# EAGLE board Elektronikentwurf_Part_01_v9 (EAGLE 9.7.0)
LOETE-SEITE: LOETE-SEITE; STECK-SEITE: STECK-SEITE
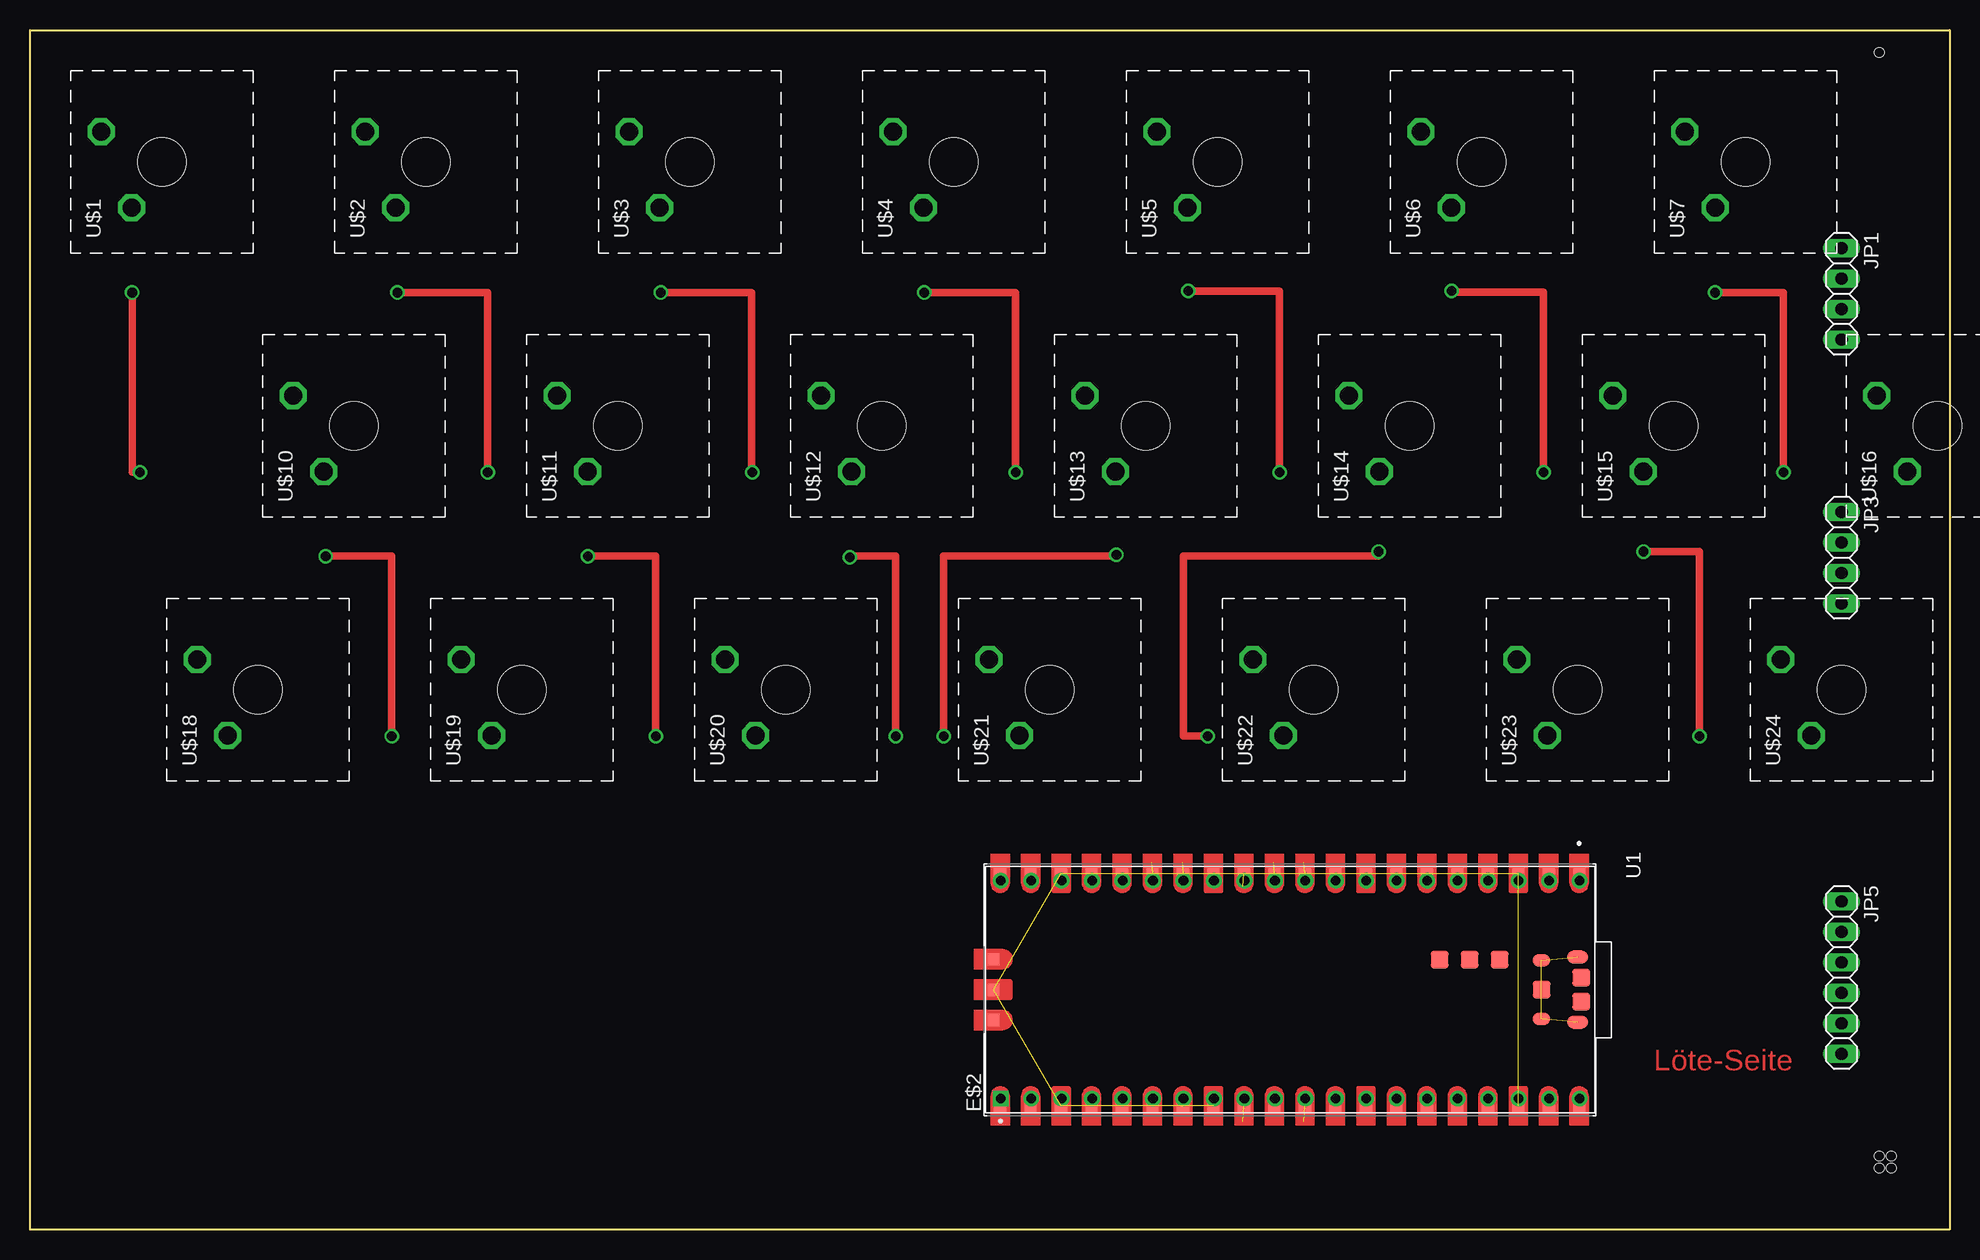
[diagram p0: board, top side]
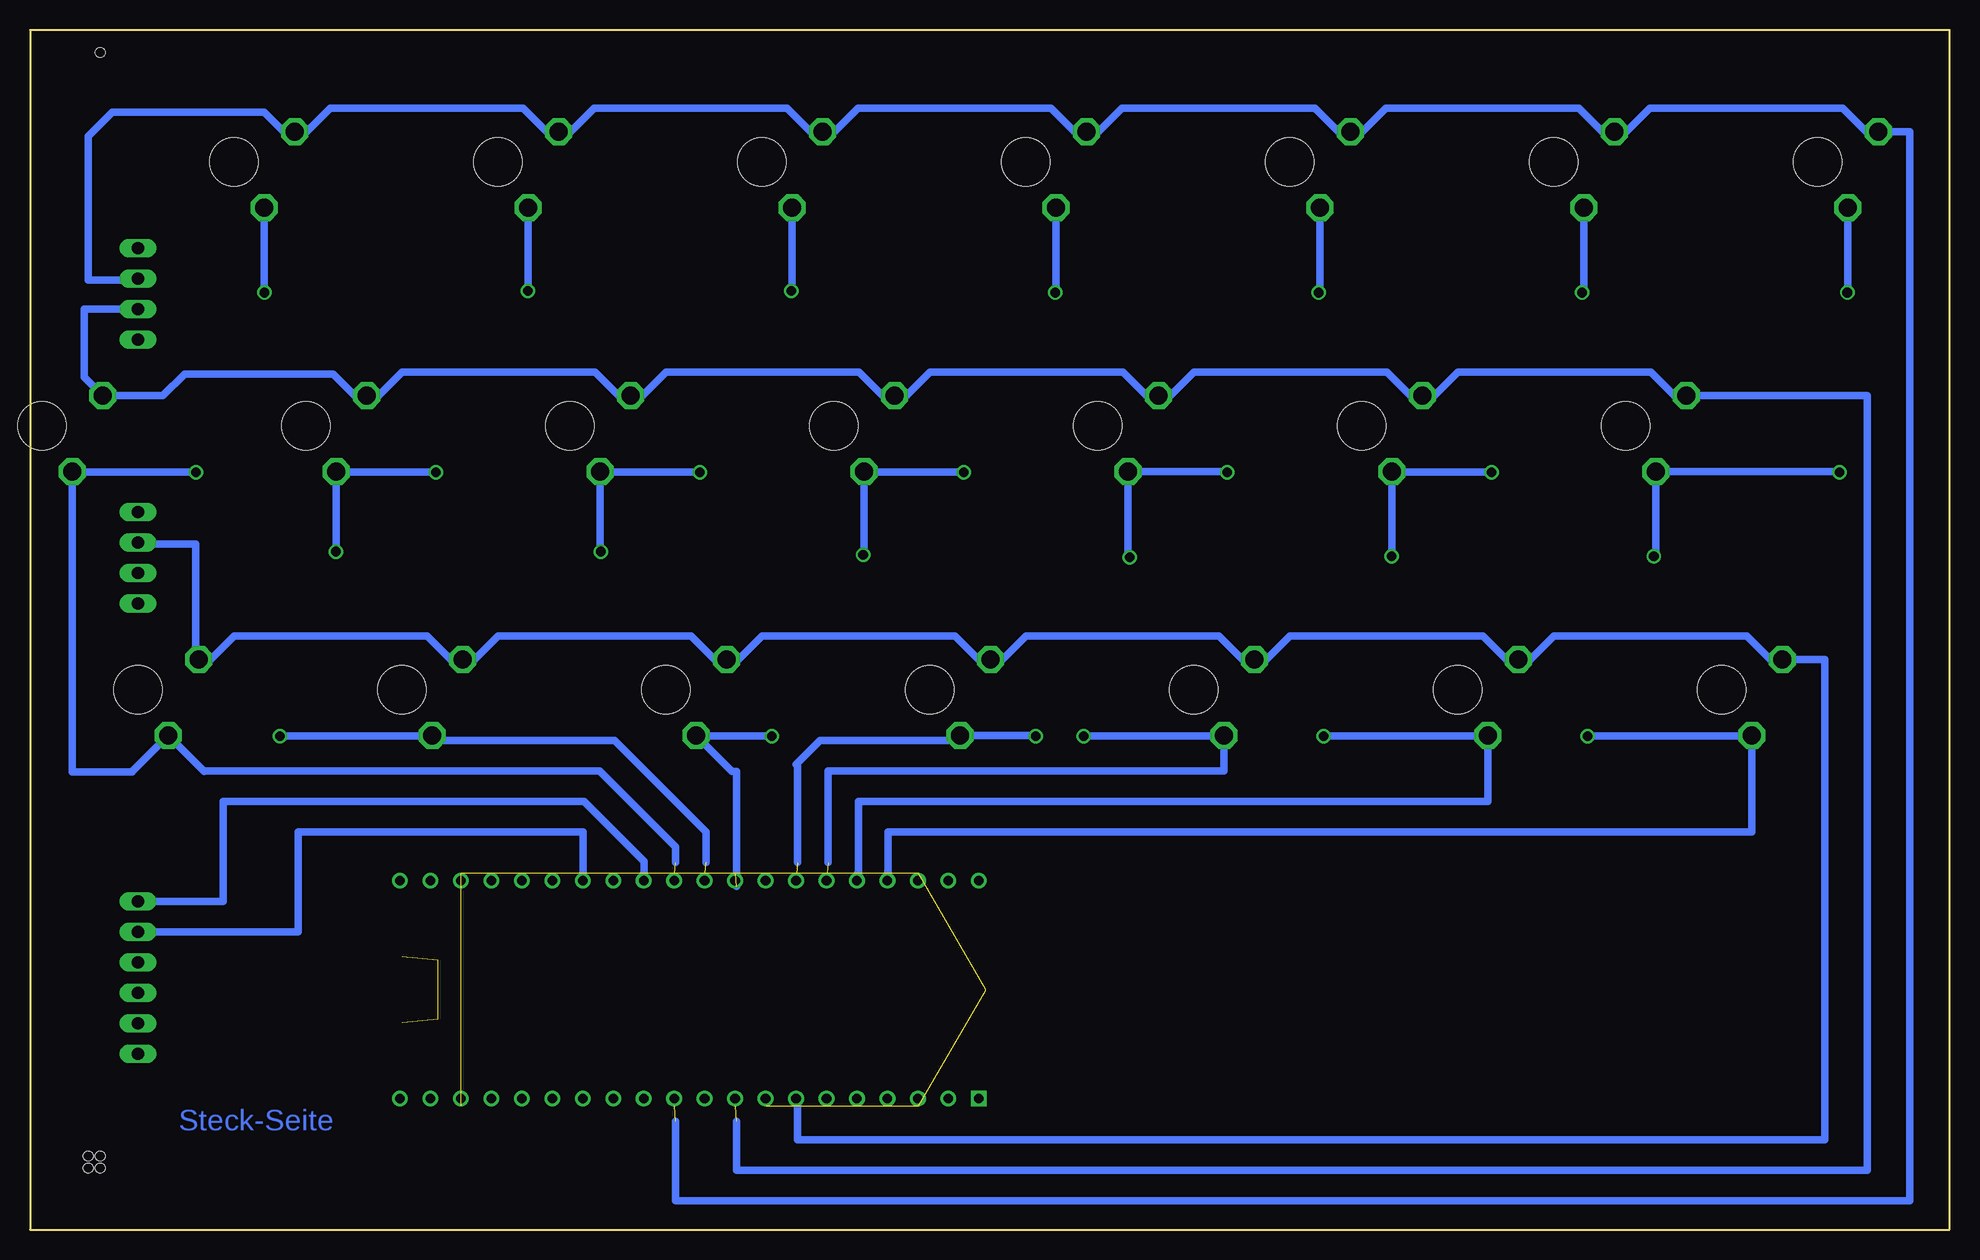
[diagram p1: board, bottom side, seen from below]

Size 160 x 100 mm. Coordinates in mm from the lower left corner, seen from the top.
Outline: 0,0 0,100 160,100 160,0 0,0
Copper layers (1*16): Top 0.035mm / dielectric 1.5mm / Bottom 0.035mm
Design rules "Fusion Electronics Design Rules": minimum track width 6mil, minimum drill 0.35mm, track to track 6mil, track to pad 6mil, pad to pad 6mil, via to via 6mil, smd to smd 6mil, copper to edge 40mil, drill to drill 6mil, minimum pad ring 10mil, minimum via ring 8mil, stop-mask expansion 4mil, vias tented up to drill 9999mil, thermal gap 10mil
Holes 0.8 mm at 154.15,6.13 155.15,6.13 155.15,5.13 154.15,5.13 154.15,98.13

## Footprints (pad centres in the part's own frame; a part is rotated, then mirrored left to right if it is on the bottom)
HARWIN_D2840-42 = drill 0.8 square: 1 -7.62,24.13 | drill 0.8: 2 -7.62,21.59; 3 -7.62,19.05; 4 -7.62,16.51; 5 -7.62,13.97; 6 -7.62,11.43; 7 -7.62,8.89; 8 -7.62,6.35; 9 -7.62,3.81; 10 -7.62,1.27; 11 -7.62,-1.27; 12 -7.62,-3.81; 13 -7.62,-6.35; 14 -7.62,-8.89; 15 -7.62,-11.43; 16 -7.62,-13.97; 17 -7.62,-16.51; 18 -7.62,-19.05; 19 -7.62,-21.59; 20 -7.62,-24.13; 21 10.541,-24.13; 22 10.541,-21.59; 23 10.541,-19.05; 24 10.541,-16.51; 25 10.541,-13.97; 26 10.541,-11.43; 27 10.541,-8.89; 28 10.541,-6.35; 29 10.541,-3.81; 30 10.541,-1.27; 31 10.541,1.27; 32 10.541,3.81; 33 10.541,6.35; 34 10.541,8.89; 35 10.541,11.43; 36 10.541,13.97; 37 10.541,16.51; 38 10.541,19.05; 39 10.541,21.59; 40 10.541,24.13
1X04 = drill 1.016 long: 1 -3.81,0; 2 -1.27,0; 3 1.27,0; 4 3.81,0
1X06 = drill 1.016 long: 1 -6.35,0; 2 -3.81,0; 3 -1.27,0; 4 1.27,0; 5 3.81,0; 6 6.35,0
MODULE_SC0917 = smd 1 x 1: 1 -9.69,24.13; 2 -9.69,21.59; 3 -9.69,19.05; 4 -9.69,16.51; 5 -9.69,13.97; 6 -9.69,11.43; 7 -9.69,8.89; 8 -9.69,6.35; 9 -9.69,3.81; 10 -9.69,1.27; 11 -9.69,-1.27; 12 -9.69,-3.81; 13 -9.69,-6.35; 14 -9.69,-8.89; 15 -9.69,-11.43; 16 -9.69,-13.97; 17 -9.69,-16.51; 18 -9.69,-19.05; 19 -9.69,-21.59; 20 -9.69,-24.13; 21 9.69,-24.13; 22 9.69,-21.59; 23 9.69,-19.05; 24 9.69,-16.51; 25 9.69,-13.97; 26 9.69,-11.43; 27 9.69,-8.89; 28 9.69,-6.35; 29 9.69,-3.81; 30 9.69,-1.27; 31 9.69,1.27; 32 9.69,3.81; 33 9.69,6.35; 34 9.69,8.89; 35 9.69,11.43; 36 9.69,13.97; 37 9.69,16.51; 38 9.69,19.05; 39 9.69,21.59; 40 9.69,24.13; D1 -2.54,-24.7; D2 0,-24.7; D3 2.54,-24.7 | smd 1.1 x 1.8: A -2.725,24; B 2.725,24 | smd 1.05 x 1.45: C -2.425,20.97; D 2.425,20.97 | smd 1.5 x 1.5: TP1 0,21; TP2 1,24.3; TP3 -1,24.3; TP4 -2.5,17.5; TP5 -2.5,15; TP6 -2.5,12.5
CHERRY_MX1A-11NN_SWITCH = drill 1.5 octagon: P$1 2.51,5.08; P$2 -3.81,2.54 | hole 3.988: 0,0

## Placement (x,y rotation side)
E$2  [HARWIN_D2840-42]  105.04,18.54 90 top
JP1  PINHD-1X4  [1X04]  151,78 270 top
JP3  PINHD-1X4  [1X04]  151,56 270 top
JP5  PINHD-1X6  [1X06]  151,21 270 top
U1  SC0917  [MODULE_SC0917]  105,20 270 top
U$1  GEILER_TASTER  [CHERRY_MX1A-11NN_SWITCH]  11,89 90 top
U$2  GEILER_TASTER  [CHERRY_MX1A-11NN_SWITCH]  33,89 90 top
U$3  GEILER_TASTER  [CHERRY_MX1A-11NN_SWITCH]  55,89 90 top
U$4  GEILER_TASTER  [CHERRY_MX1A-11NN_SWITCH]  77,89 90 top
U$5  GEILER_TASTER  [CHERRY_MX1A-11NN_SWITCH]  99,89 90 top
U$6  GEILER_TASTER  [CHERRY_MX1A-11NN_SWITCH]  121,89 90 top
U$7  GEILER_TASTER  [CHERRY_MX1A-11NN_SWITCH]  143,89 90 top
U$10  GEILER_TASTER  [CHERRY_MX1A-11NN_SWITCH]  27,67 90 top
U$11  GEILER_TASTER  [CHERRY_MX1A-11NN_SWITCH]  49,67 90 top
U$12  GEILER_TASTER  [CHERRY_MX1A-11NN_SWITCH]  71,67 90 top
U$13  GEILER_TASTER  [CHERRY_MX1A-11NN_SWITCH]  93,67 90 top
U$14  GEILER_TASTER  [CHERRY_MX1A-11NN_SWITCH]  115,67 90 top
U$15  GEILER_TASTER  [CHERRY_MX1A-11NN_SWITCH]  137,67 90 top
U$16  GEILER_TASTER  [CHERRY_MX1A-11NN_SWITCH]  159,67 90 top
U$18  GEILER_TASTER  [CHERRY_MX1A-11NN_SWITCH]  19,45 90 top
U$19  GEILER_TASTER  [CHERRY_MX1A-11NN_SWITCH]  41,45 90 top
U$20  GEILER_TASTER  [CHERRY_MX1A-11NN_SWITCH]  63,45 90 top
U$21  GEILER_TASTER  [CHERRY_MX1A-11NN_SWITCH]  85,45 90 top
U$22  GEILER_TASTER  [CHERRY_MX1A-11NN_SWITCH]  107,45 90 top
U$23  GEILER_TASTER  [CHERRY_MX1A-11NN_SWITCH]  129,45 90 top
U$24  GEILER_TASTER  [CHERRY_MX1A-11NN_SWITCH]  151,45 90 top

## Library data of the parts
E$2 = D2840-42
JP1 JP3 = Connector; CATEGORY: Headers; DESCRIPTION: Header-Straight-4 Position; PACKAGE_TYPE: THT; PITCH: 0.100" (2.54mm); SUBCATEGORY: Headers-Male Pins; TYPE: Board to Board or Cable-Unshrouded-Through Hole-Straight
JP5 = Connector; CATEGORY: Headers; DESCRIPTION: Header-Straight-6 Position; PACKAGE_TYPE: THT; PITCH: 0.100" (2.54mm); SUBCATEGORY: Headers-Male Pins; TYPE: Board to Board or Cable-Unshrouded-Through Hole-Straight
U1 = SC0917; AVAILABILITY: In Stock; CHECK_PRICES: https://www.snapeda.com/parts/SC0917/Raspberry+Pi/view-part/?ref=eda; DESCRIPTION: RP2040 Raspberry Pi Pico - ARM® Cortex®-M0+ MCU 32-Bit Embedded Evaluation Board; MF: Raspberry Pi; MP: SC0917; PACKAGE: None; PRICE: None; SNAPEDA_LINK: https://www.snapeda.com/parts/SC0917/Raspberry+Pi/view-part/?ref=snap
U$1-U$7 U$10-U$16 U$18-U$24 = Hammer_Taster; AVAILABILITY: In Stock; CHECK_PRICES: https://www.snapeda.com/parts/MX1A-11NN/Cherry/view-part/?ref=eda; DESCRIPTION: Switch,Key,SPST-NO,Keyboard,Low Profile,10mA,12VDC,Face Place Mount,Std Force | Cherry Americas MX1A-11NN; MF: Cherry; MP: MX1A-11NN; PACKAGE: None; PRICE: None; SNAPEDA_LINK: https://www.snapeda.com/parts/MX1A-11NN/Cherry/view-part/?ref=snap

## Nets
3V3_OUT: U1.36
ADC_VREF: U1.35
AGND: U1.33
GND: U1.3 U1.8 U1.13 U1.18 U1.23 U1.28 U1.38 U1.D2
N$1: U1.31 U$1.P$1 U$2.P$1 U$3.P$1 U$4.P$1 U$5.P$1 U$6.P$1 U$7.P$1
N$2: U1.29 U$10.P$1 U$11.P$1 U$12.P$1 U$13.P$1 U$14.P$1 U$15.P$1 U$16.P$1
N$3: U1.27 U$18.P$1 U$19.P$1 U$20.P$1 U$21.P$1 U$22.P$1 U$23.P$1 U$24.P$1
N$4: U1.17 U$1.P$2 U$10.P$2 U$18.P$2
N$5: U1.16 U$2.P$2 U$11.P$2 U$19.P$2
N$6: U1.15 U$3.P$2 U$12.P$2 U$20.P$2
N$16: U1.14 U$4.P$2 U$13.P$2 U$21.P$2
N$17: U1.12 U$5.P$2 U$14.P$2 U$22.P$2
N$18: U1.11 U$6.P$2 U$15.P$2 U$23.P$2
N$19: U1.10 U$7.P$2 U$16.P$2 U$24.P$2
N$20: JP5.1 U1.9
N$21: JP5.2 U1.7
TP1_GND: U1.TP1
USB_SHIELD: U1.A U1.B U1.C U1.D
VBUS: U1.40
VSYS: U1.39

## Tracks (layer width: path | path; a pad name or v marks a point on that pad's centre or on a via)
GND  (7 unrouted)
N$1  (1 unrouted)
  Bottom 0.61: 106.18,9.02 106.18,2.4 3.31,2.4 3.31,91.51 U$1.P$1 6.92,91.51 8.88,93.47 24.96,93.47 26.92,91.51 U$2.P$1 28.92,91.51 30.88,93.47 46.96,93.47 48.92,91.51 U$3.P$1 50.92,91.51 52.88,93.47 68.96,93.47 70.92,91.51 U$4.P$1 72.92,91.51 74.88,93.47 90.96,93.47 92.92,91.51 U$5.P$1 94.92,91.51 96.88,93.47 112.96,93.47 114.92,91.51 U$6.P$1 116.92,91.51 118.88,93.47 134.96,93.47 136.92,91.51 U$7.P$1 138.86,91.51 140.48,93.13 153.15,93.13 155.15,91.13 155.15,79.13
N$2  (1 unrouted)
  Bottom 0.61: 101.1,9.02 101.1,4.94 6.85,4.94 6.85,69.51 U$10.P$1 22.92,69.51 24.88,71.47 40.96,71.47 42.92,69.51 U$11.P$1 44.92,69.51 46.88,71.47 62.96,71.47 64.92,69.51 U$12.P$1 66.92,69.51 68.88,71.47 84.96,71.47 86.92,69.51 U$13.P$1 88.92,69.51 90.88,71.47 106.96,71.47 108.92,69.51 U$14.P$1 110.92,69.51 112.88,71.47 128.96,71.47 130.92,69.51 U$15.P$1 132.92,69.51 134.72,71.31 147.12,71.31 148.92,69.51 U$16.P$1 155.46,71.05 155.46,76.71 151.01,76.71
N$3  (1 unrouted)
  Bottom 0.61: 96.02,10.29 96.02,7.48 10.39,7.48 10.39,47.51 U$18.P$1 14.92,47.51 16.88,49.47 32.96,49.47 34.92,47.51 U$19.P$1 36.92,47.51 38.88,49.47 54.96,49.47 56.92,47.51 U$20.P$1 58.92,47.51 60.88,49.47 76.96,49.47 78.92,47.51 U$21.P$1 80.92,47.51 82.88,49.47 98.96,49.47 100.92,47.51 U$22.P$1 102.92,47.51 104.88,49.47 120.96,49.47 122.92,47.51 U$23.P$1 124.92,47.51 126.88,49.47 142.96,49.47 144.92,47.51 U$24.P$1 146.2,47.79 146.2,57.15 151.15,57.15 151.15,57.13
N$4  (via drill 0.8)
  Top 0.61: v8.52,78.11 8.52,63.13 v9.15,63.13 v9.15,63.12 | v24.65,56.14 v24.65,56.13 30.15,56.13 v30.15,41.13
  Bottom 0.61: U1.17 88.49,33.15 16.46,33.15 U$18.P$2 16.46,41.13 v30.15,41.13 | U$1.P$2 8.46,78.11 v8.52,78.11 | v9.15,63.12 9.15,63.19 U$10.P$2 24.46,56.14 v24.65,56.14
N$5  (via drill 0.8)
  Top 0.61: v30.62,78.11 38.15,78.11 v38.15,63.13 | v46.49,56.14 v46.49,56.13 52.15,56.13 v52.15,41.13
  Bottom 0.61: U1.16 91.03,29.34 90.94,29.34 90.94,35.69 38.46,35.69 U$19.P$2 38.46,41.13 v52.15,41.13 | U$2.P$2 30.46,78.11 v30.62,78.11 | v38.15,63.13 46.46,63.13 U$11.P$2 46.46,56.14 v46.49,56.14
N$6  (via drill 0.8)  (1 unrouted)
  Top 0.61: v52.59,78.11 60.15,78.11 60.15,63.13 v60.21,63.13 | v68.33,56.03 68.44,56.13 72.15,56.13 v72.15,41.13
  Bottom 0.61: 93.48,30.61 93.48,38.23 60.46,38.23 U$20.P$2 60.46,41.13 v72.15,41.13 | U$3.P$2 52.46,78.11 v52.59,78.11 | v60.21,63.13 60.21,63.19 U$12.P$2 68.46,55.9 v68.33,56.03
N$16  (via drill 0.8)  (1 unrouted)
  Top 0.61: v74.56,78.11 82.15,78.11 v82.15,63.13 | v90.56,56.26 90.56,56.13 76.15,56.13 v76.15,41.13
  Bottom 0.61: 96.02,30.61 96.02,38.77 96.15,38.77 94.15,40.77 82.46,40.77 U$21.P$2 76.15,41.19 v76.15,41.13 | U$4.P$2 74.46,78.11 v74.56,78.11 | v82.15,63.13 90.46,63.13 U$13.P$2 90.46,56.26 v90.56,56.26
N$17  (via drill 0.8)  (1 unrouted)
  Top 0.61: v96.53,78.23 104.15,78.23 v104.15,63.13 | v112.4,56.52 112.4,56.13 96.15,56.13 96.15,41.13 v98.15,41.13
  Bottom 0.61: 101.1,28.61 101.1,38.19 101.46,38.19 U$22.P$2 104.46,41.13 v98.15,41.13 | U$5.P$2 96.46,78.23 v96.53,78.23 | v104.15,63.13 112.46,63.13 U$14.P$2 112.46,56.52 v112.4,56.52
N$18  (via drill 0.8)  (1 unrouted)
  Top 0.61: v118.5,78.23 118.5,78.13 126.15,78.13 v126.15,63.13 | v134.5,56.52 139.15,56.52 v139.15,41.13
  Bottom 0.61: 103.64,30.61 103.64,33.15 111.26,40.77 126.46,40.77 U$23.P$2 126.46,41.13 v139.15,41.13 | U$6.P$2 118.46,78.23 v118.5,78.23 | v126.15,63.13 134.46,63.13 U$15.P$2 134.46,56.52 v134.5,56.52
N$19  (via drill 0.8)  (1 unrouted)
  Top 0.61: v140.47,78.11 146.15,78.11 v146.15,63.13
  Bottom 0.61: 106.18,30.61 106.18,31.88 112.53,38.23 145.46,38.23 145.46,38.19 U$24.P$2 151.46,38.19 151.46,38.13 156.46,38.13 U$16.P$2 156.46,63.13 v146.15,63.13 | U$7.P$2 v140.46,78.12 v140.47,78.11
N$20
  Bottom 0.61: JP5.1 143.9,27.35 143.9,35.69 113.8,35.69 108.81,30.7 U1.9
N$21
  Bottom 0.61: JP5.2 137.66,24.81 137.66,33.15 113.89,33.15 U1.7
S$1
  Bottom 0.61: 155.15,79.13 150.88,79.13
USB_SHIELD  (3 unrouted)

## Text on the board
Top: Löte-Seite
Bottom: Steck-Seite